# Altium PCB Avometer v1.1 Simple.PcbDoc
Units mm, origin at the board's own origin, x right, y up, seen from the top; angles counter-clockwise.
Board outline 45 x 30 mm, 2 copper layers (Top Layer, Bottom Layer), stack 1.571 mm thick; 45 components, 43 nets, 171 pads, 36 vias.
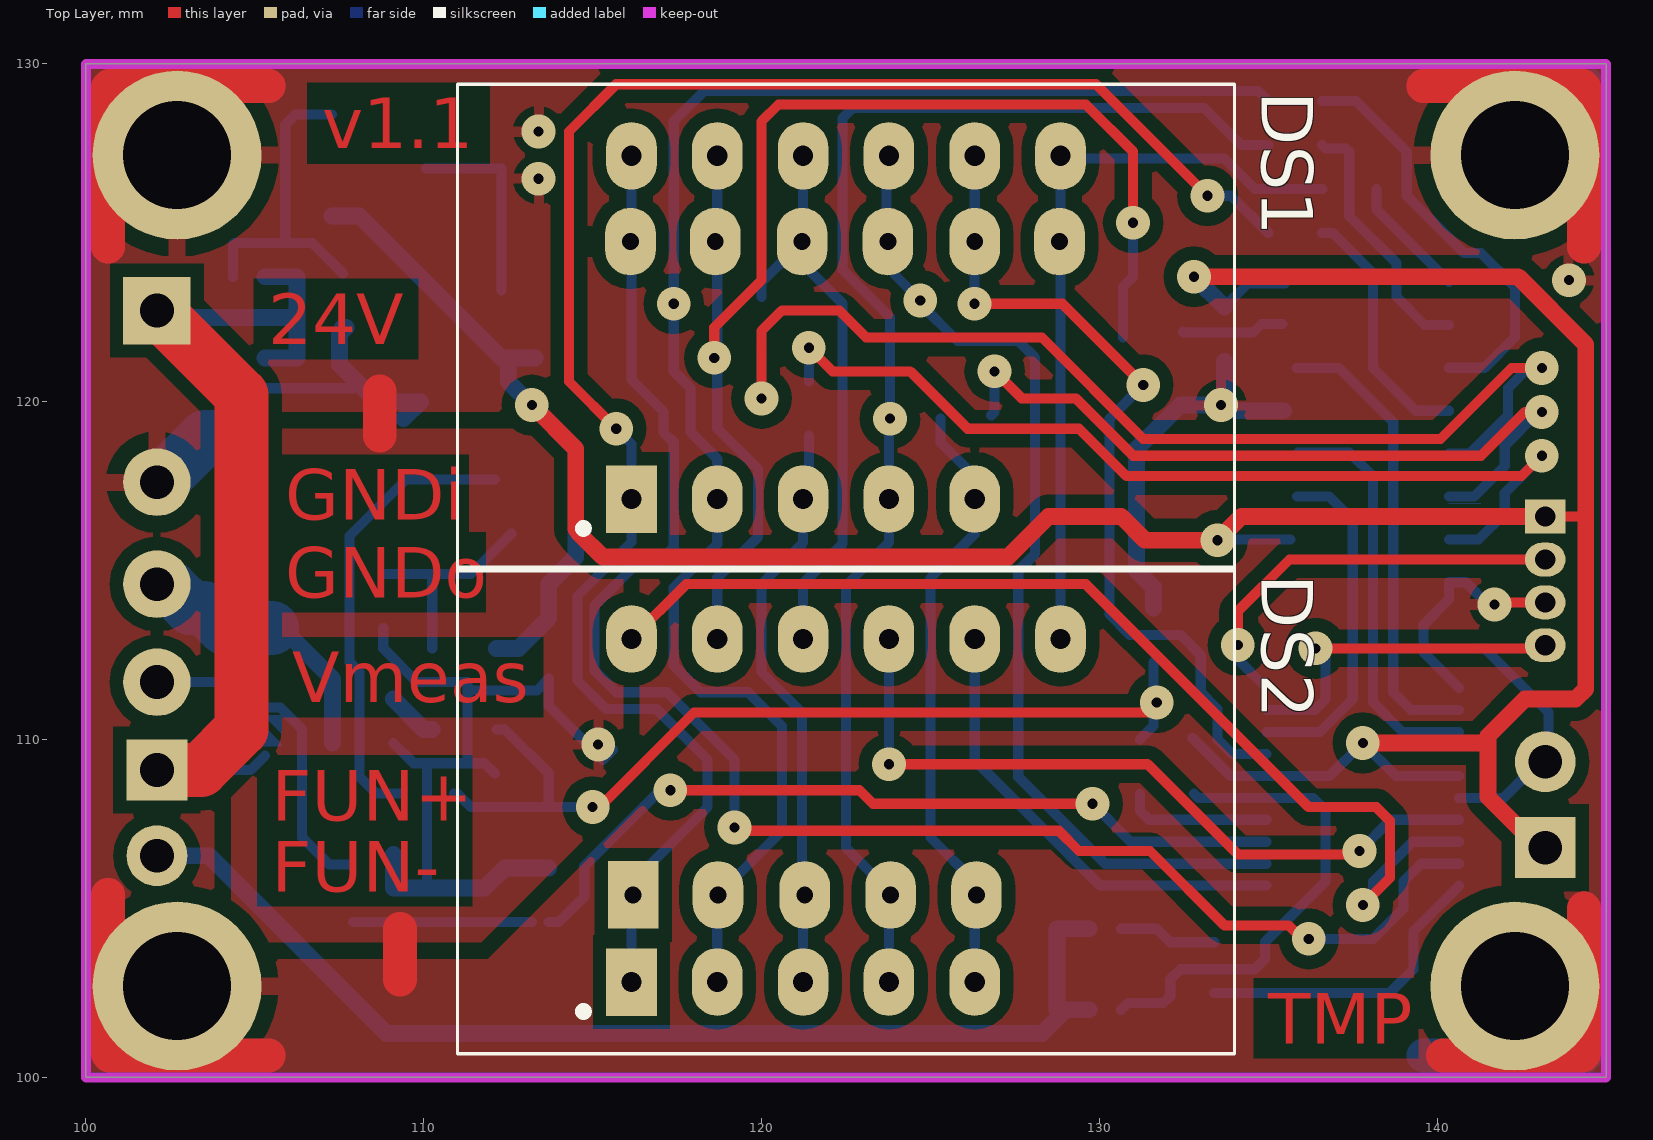
[diagram p0: Top Layer view]
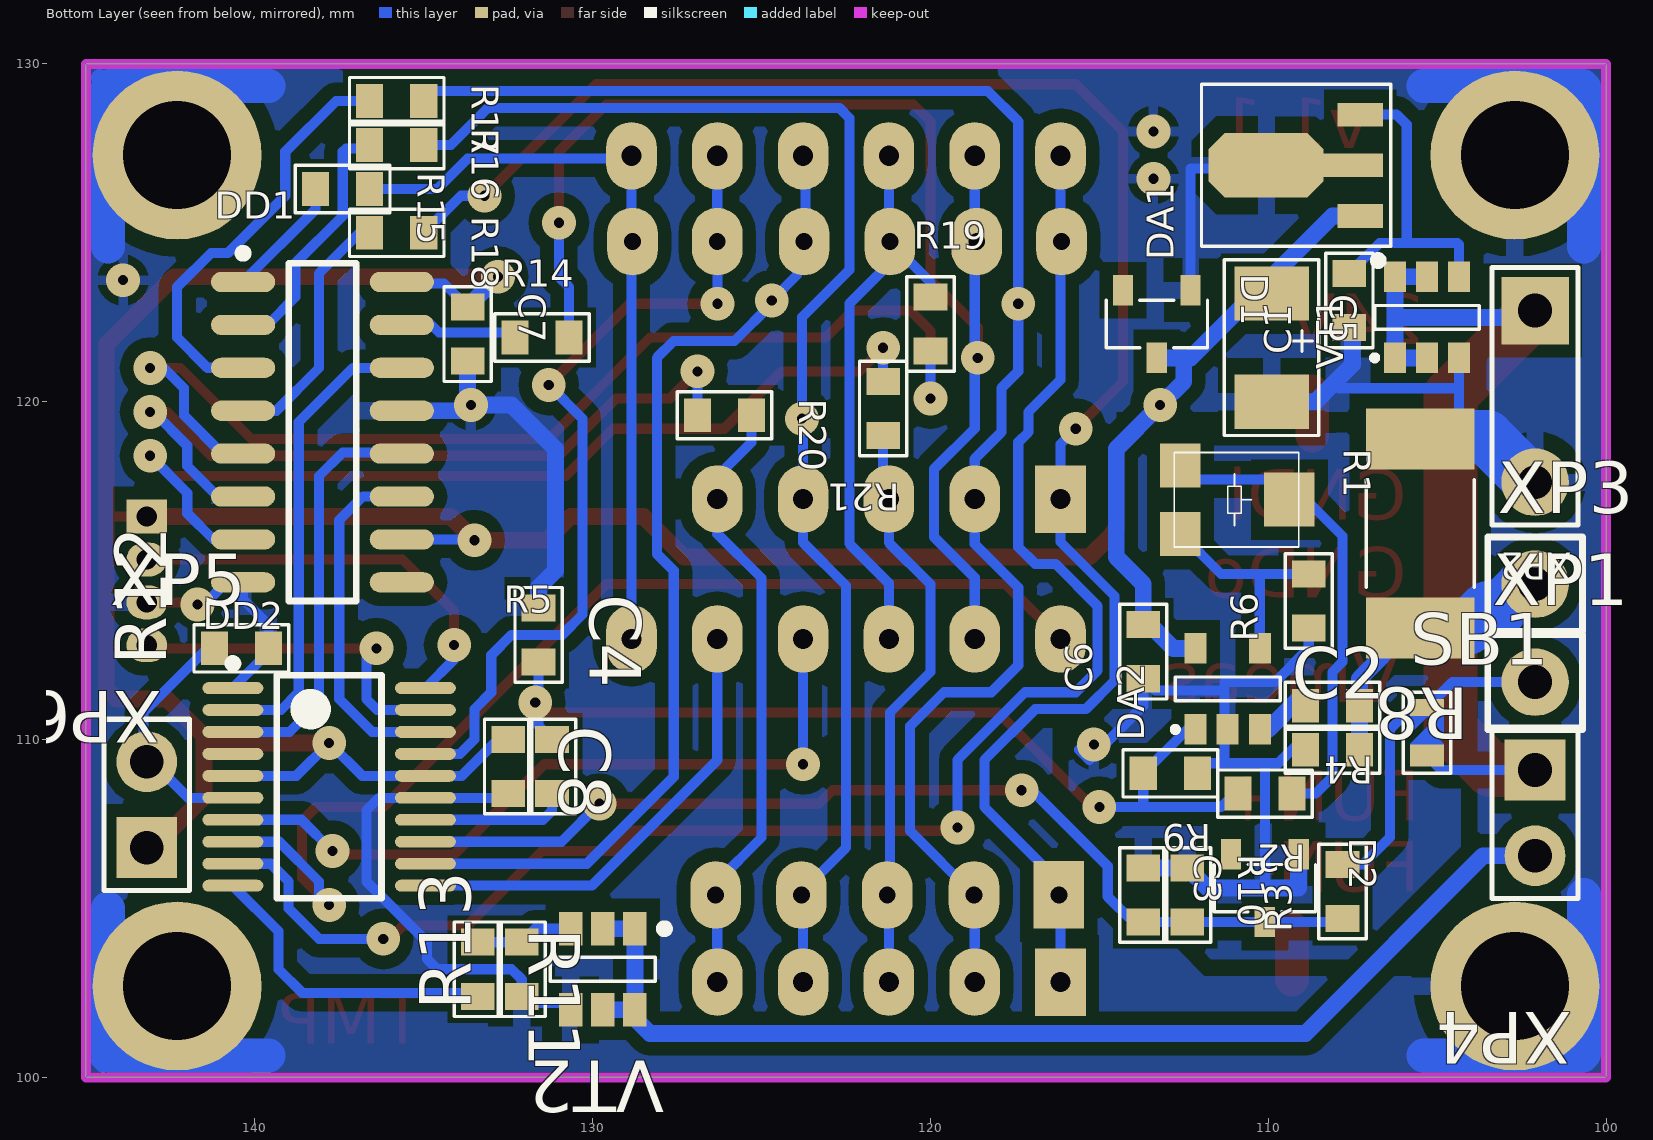
[diagram p1: Bottom Layer view, seen from below]
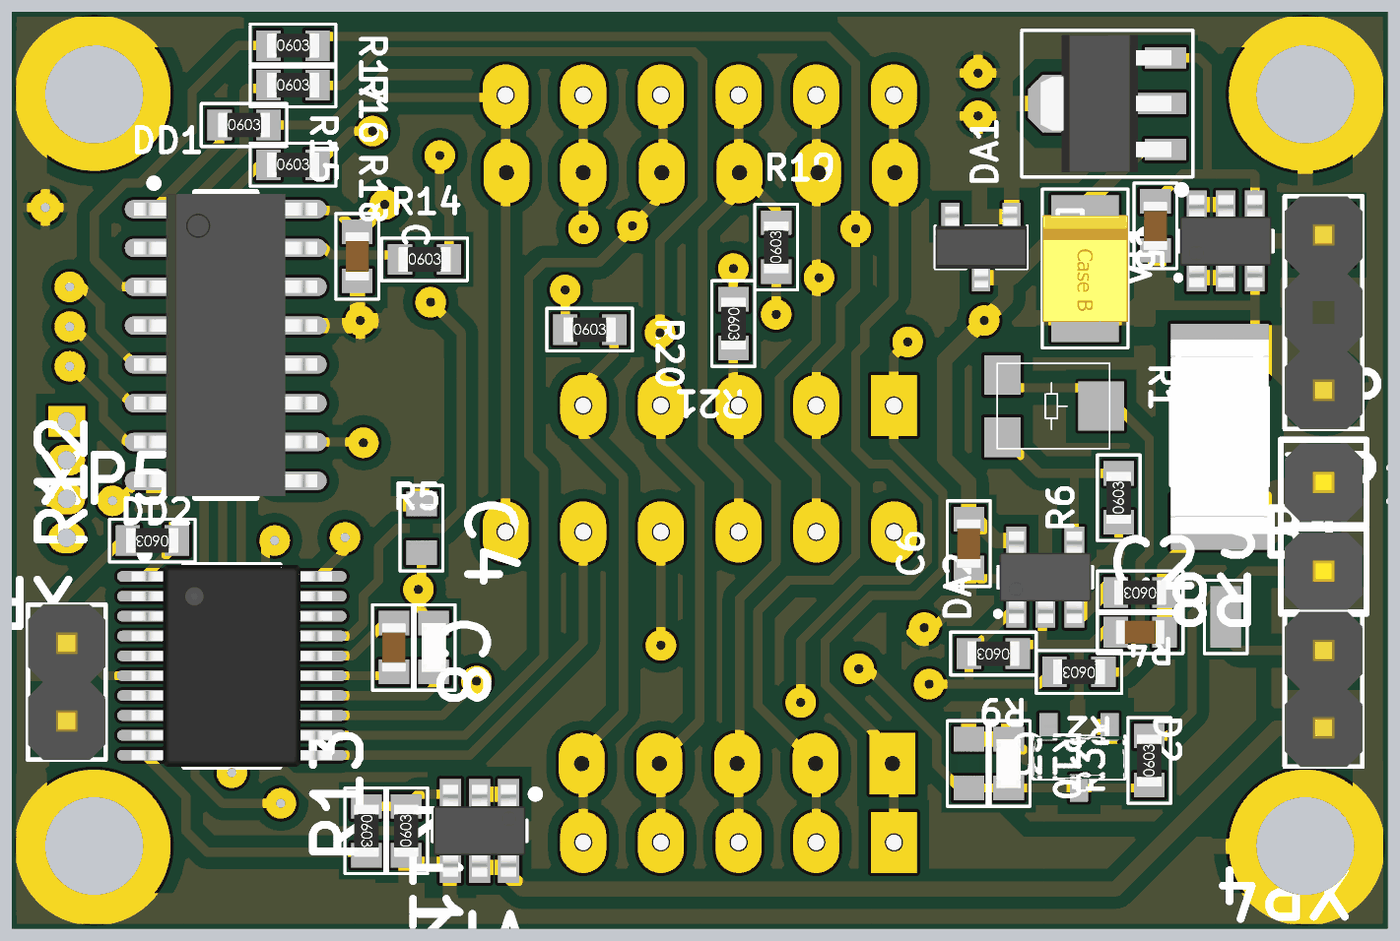
[diagram p2: 3D render of the assembled board from below, using the file's embedded part models]

## Layer stack, top to bottom
Top Solder: solder mask 0.0102, Solder Resist, Dk 3.5
Top Layer: signal copper 0.0356
Dielectric 1: dielectric 1.5, FR-4, Dk 4.8
Bottom Layer: signal copper 0.0356
Bottom Solder: solder mask 0.0102, Solder Resist, Dk 3.5

## Board outline
100,100 145,100 145,130 100,130

## Design rules (kind name [scope] priority, off if disabled: settings)
AssemblyTestPointUsage [All] p1 off:
AssemblyTestpoint [All] p1 off: testpointundercomponent=TRUE minsize=1.016 maxsize=2.54 preferedsize=1.524 minholesize=0 maxholesize=1.016 preferedholesize=0.813 testpointgrid=0.025 usegrid=TRUE gridtolerance=0 allowsidetop=TRUE allowsidebottom=TRUE
Clearance KeepOutClrnc [All vs OnLayer('Keep-Out Layer')] p1: gap=0 ignorepadtopadclearanceinfootprint=FALSE
Clearance Cl-nce_USBUF [(ObjectKind = 'Pad') and (Component = 'DA10') vs ispad or isvia or istrack or isregion] p2: gap=0.15 ignorepadtopadclearanceinfootprint=FALSE except(0: Arc-Hole Track-Hole SMDPad-Hole THPad-Hole Via-Hole Fill-Hole Poly-Hole Region-Hole Text-Hole)
Clearance Cl-nce_Poly-Pads&Vias_1 [InPolygon vs ispad or isvia or istrack or isregion or isfill] p3: gap=0.4 ignorepadtopadclearanceinfootprint=FALSE except(0: Arc-Hole Track-Hole SMDPad-Hole THPad-Hole Via-Hole Fill-Hole Poly-Hole Region-Hole Text-Hole)
Clearance [All] p4: gap=0.2 ignorepadtopadclearanceinfootprint=FALSE except(0: Arc-Hole Track-Hole SMDPad-Hole THPad-Hole Via-Hole Fill-Hole Poly-Hole Region-Hole Text-Hole)
ComponentClearance [All] p1: gap=0 collisioncheckmode=3 verticalgap=0.1 showdistances=TRUE
DiffPairsRouting [All] p1: maxlimit=100 minlimit=0.25 mostfreqgap=0.254 toplayer_minwidth=0.2 toplayer_maxwidth=0.5 toplayer_prefwidth=0.25 bottomlayer_minwidth=0.2 bottomlayer_maxwidth=0.5 bottomlayer_prefwidth=0.25 maxuncoupledlength=50
FabricationTestPointUsage [All] p1 off: valid=0 allowmultiple=FALSE
FabricationTestpoint [All] p1 off: side=3 testpointundercomponent=TRUE minsize=1.016 maxsize=2.54 preferedsize=1.524 minholesize=0 maxholesize=1.016 preferedholesize=0.813 testpointgrid=0.025 allowsidetop=TRUE allowsidebottom=TRUE usegrid=TRUE gridtolerance=0
HoleSize [All] p1: absolutevalues=TRUE maxlimit=4 minlimit=0.025 maxpercent=80.000 minpercent=20.000
MatchedLengths [InNetClass('DiffPairs')] p1: tolerance=1 checknetsindiffpair=TRUE checkdiffpairvsdiffpair=FALSE checkxsignals=FALSE checkothers=FALSE
PlaneClearance [All] p1: clearance=0.1
PolygonConnect PCon_fill [All vs isregion or isfill] p1 off: connectstyle=Direct reliefconductorwidth=0.254 reliefentries=4 polygonreliefangle="90 Angle" airgapwidth=0.254
PolygonConnect PCon_via [All vs isvia] p2: connectstyle=Relief reliefconductorwidth=0.3 reliefentries=4 polygonreliefangle="90 Angle" airgapwidth=0.25
PolygonConnect [All] p3: connectstyle=Relief reliefconductorwidth=0.5 reliefentries=4 polygonreliefangle="90 Angle" airgapwidth=0.5
RoutingVias [All] p1: holewidth=0.3 width=1.27 viastyle="Through Hole" minholewidth=0.3 minwidth=1.27 maxholewidth=0.3 maxwidth=1.27
SilkToBoardRegionClearance [All] p1 off:
SilkToSilkClearance [All] p1 off: silktosilkclearance=0
SilkToSolderMaskClearance [IsPad] p1 off: minsilkscreentomaskgap=0.1 clearancetoexposedcopper=TRUE
SolderMaskExpansion [All] p1: expansion=0.102
Width [All] p1: maxlimit=2.5 minlimit=0.3 preferedwidth=0.3
19 further rules are at their usual default settings.

## Components (designator, comment, footprint, x,y, rotation, side; value= is the part's Value field where it differs from the comment)
C1 "0.1uF" "CAP 0603_N" 107.6,123 r90 bottom
C2 "0.1" "CAP 0603_N" 108.1,109.7 r180 bottom
C3 "0.1uF" "CAP 0603_N" 113.7,105.4 r270 bottom
C4 "0.1" "CAP 0603_N" 131.6,113.1 r270 bottom
C5 "100uF 6V3" CAP_TANT_B_TYPE_3528-21 109.9,121.6 r270 bottom
C6 "0.1" "CAP 0603_N" 113.7,112.6 r90 bottom
C7 "0.1" "CAP 0603_N" 133.7,122 r270 bottom
C8 "0.1" "CAP 0603_N" 132.5,109.2 r270 bottom
D1 "BZX84C3V6" SOT-23_L 113.3,122.3 r270 bottom
D2 "BZX84-3V6" SOT-23_L 110.1,105.6 r270 bottom
DA1 "L78L33ABUTR" SOT-89 107.5,127 r90 bottom
DA2 "MCP6001" SOT-23-5_L 111.2,111.5 r90 bottom
DD1 "74HC595D SMD" SOIC-16_L 138,119.1 r180 bottom
DD2 "STM32F030F4P6" TSSOP-20_N 137.8,108.6 r180 bottom
DS1 "7SEGM_KEM-3631-AG" 7SEGM_KEM-3631-AG_BLUE 122.5,122.2 r0 top locked
DS2 "7SEGM_KEM-3631-AG" 7SEGM_KEM-3631-AG_RED 122.5,107.9 r0 top locked
R1 "10k" "RES VAR 1" 111,117.1 r270 bottom
R2 "36k" "RES 0603_N" 110.1,108.4 r0 bottom
R3 "100k" "RES 0603_N" 107.8,105.5 r90 bottom
R4 "100" "RES 0603_N" 108.1,111 r0 bottom
R5 "10k" "RES 0603_N" 131.2,109.2 r90 bottom
R6 "300" "RES 0603_N" 108.8,114.1 r90 bottom
R8 "0.02" "RES 2512" 105.5,116.1 r270 bottom
R9 "10k" "RES 0603_N" 112.9,109 r0 bottom
R10 "15k" "RES 0603_N" 112.4,105.4 r270 bottom
R11 "47" "RES 0603_N" 133.4,103.2 r270 bottom
R12 "33k" "RES 0603_N" 140.4,112.7 r0 bottom
R13 "100k" "RES 0603_N" 132.1,103.2 r90 bottom
R14 "47" "RES 0603_N" 131.5,121.9 r180 bottom
R15 "47" "RES 0603_N" 137.4,126.3 r180 bottom
R16 "47" "RES 0603_N" 135.8,127.6 r180 bottom
R17 "47" "RES 0603_N" 135.8,128.9 r180 bottom
R18 "47" "RES 0603_N" 135.8,125 r180 bottom
R19 "47" "RES 0603_N" 120,122.3 r90 bottom
R20 "47" "RES 0603_N" 126.1,119.6 r180 bottom
R21 "47" "RES 0603_N" 121.4,119.8 r270 bottom
SB1 "Source" JUMPER_SOLDERED 105.3,110.2 r90 bottom
VT1 "IRLMS6802T" SOT-23-6_L 105.3,122.5 r90 bottom
VT2 "IRLTS6342" TSOP-6 129.7,103.2 r0 bottom
XP1 "USENSE" CON_PIN 102.1,111.7 r180 bottom
XP2 "Input" CON_5.08MM_1X2 102.1,122.7 r270 bottom
XP3 "Output" CON_PIN 102.1,114.6 r270 bottom
XP4 "Fun" CON_2.54MM_1X2 102.1,109.1 r270 bottom
XP5 "Temp" CON_2.54MM_1X2 143.2,106.8 r90 bottom
XP6 "SWD" CON_1.27MM_1X4_SWD 143.2,116.6 r270 bottom

## Footprints (in the part's own frame and the unit in brackets; to place one, negate y for a bottom-side part, rotate by r counter-clockwise, add the part's x,y. Pads: shape width x height; smd on the part's side, far side on the other; paste and mask are expansions set on the pad)
7SEGM_KEM-3631-AG_BLUE [mm] "LED, 7-Segment Display, 7.62 mm, RHD; 10 Leads; Row Space 5.08 mm; Pitch 2.54 mm"
  rect 1.5x2 hole 0.6: 1(-6.35,-5.08)
  oval 1.5x2 hole 0.6: 2(-3.81,-5.08) 3(-1.27,-5.08) 4(1.27,-5.08) 5(3.81,-5.08) 7(6.35,5.08) 8(3.81,5.08) 9(1.27,5.08) 10(-1.27,5.08) 11(-3.81,5.08) 12(-6.35,5.08)
  silkscreen extent -11.5,-7.2 11.5,7.2, body extent -11.3,-7.05 11.3,7.05, height 8.21
7SEGM_KEM-3631-AG_RED [mm] "LED, 7-Segment Display, 7.62 mm, RHD; 10 Leads; Row Space 5.08 mm; Pitch 2.54 mm"
  rect 1.5x2 hole 0.6: 1(-6.35,-5.08)
  oval 1.5x2 hole 0.6: 2(-3.81,-5.08) 3(-1.27,-5.08) 4(1.27,-5.08) 5(3.81,-5.08) 7(6.35,5.08) 8(3.81,5.08) 9(1.27,5.08) 10(-1.27,5.08) 11(-3.81,5.08) 12(-6.35,5.08)
  silkscreen extent -11.5,-7.2 11.5,7.2, body extent -11.3,-7.05 11.3,7.05, height 7.2
"CAP 0603_N" [mm] "Chip Capacitor; Body 1.6 x 0.8 mm (LxW typ)"
  rect 0.8x1 smd: 1(-0.8,0) 2(0.8,0)
  silkscreen extent -1.4,-0.7 1.4,0.7, body extent -0.8,-0.4 0.8,0.4, height 0.6
CAP_TANT_B_TYPE_3528-21 [mm] "Capacitor, SM Tantalum; Body 3.5 x 2.8 mm (LxW typ)"
  rect 1.6x2.2 smd: 1(-1.6,0) 2(1.6,0)
  silkscreen extent -2.6,-1.4 2.6,1.4, body extent -1.75,-1.4 1.75,1.4, height 1.9
CON_1.27MM_1X4_SWD [mm] "Connector; Header; 4 Position"
  rect 1x1.2 hole 0.6: 1(0,0)
  oval 1x1.2 hole 0.6: 2(1.27,0) 3(2.54,0) 4(3.81,0)
CON_2.54MM_1X2 [mm] "Connector; Header; 2 Position"
  rect 1.8x1.8 hole 1: 1(0,0)
  round 1.8 hole 1: 2(2.54,0)
  silkscreen extent -1.27,-1.27 3.8,1.27, body extent -1.28,-1.27 3.8,1.27, height 8.63
CON_5.08MM_1X2 [mm] "Connector; Header; 2 Position"
  rect 2x2 hole 1: 1(0,0)
  round 2 hole 1: 2(5.08,0)
  silkscreen extent -1.27,-1.27 6.35,1.27, body extent -1.27,-1.27 6.35,1.27, height 8.5
CON_PIN [mm] "Connector; Plug"
  round 2 hole 1: 1(0,0)
  silkscreen extent -1.4,-1.4 1.4,1.4, body extent -1.27,-1.27 1.27,1.27, height 8.85
JUMPER_SOLDERED [mm] "Chip Resistor, Body 2.0x1.2mm, IPC Low Density"
  rect 0.65x1 smd: 1(-0.675,0)
  rect 0.5x1 smd: 2(0.75,0)
  Top Layer region: -0.025,0.5 -0.025,0.5 0.475,0 -0.025,-0.5 0.525,-0.5 0.525,0.5
  Top Layer region: -0.4,-0.5 -0.4,0.5 -0.325,0.5 -0.325,0.5 0.175,0 -0.325,-0.5
  silkscreen extent -1.2,-0.7 1.2,0.7
"RES 0603_N" [mm] "Chip Resistor, Body 2.0x1.2mm, IPC Low Density"
  rect 0.8x1 smd: 1(-0.8,0) 2(0.8,0)
  silkscreen extent -1.4,-0.7 1.4,0.7, body extent -0.85,-0.4 0.85,0.4, height 0.56
"RES 2512" [mm] "Chip Resistor; Body 6.3 x 3.2 mm (LxW typ)"
  rect 1.8x3.2 smd: 1(-2.8,0) 2(2.8,0)
  silkscreen extent -1.6,-1.6 1.6,1.6, body extent -3.2,-1.6 3.2,1.6, height 0.6
"RES VAR 1" [mm] "Chip Resistor, Body 2.0x1.2mm, IPC Low Density"
  rect 1.3x1.2 smd: 1(-1.016,-1.6) 3(1.016,-1.6)
  rect 1.6x1.5 smd: 2(0,1.626)
  silkscreen extent -1.4,-1.78 1.4,1.91
SOIC-16_L [mm] "SOIC, 16-Leads, Body 9.9x3.9mm, Pitch 1.27mm, IPC High Density"
  oval 1.9x0.6 smd: 1(-2.35,4.445) 2(-2.35,3.175) 3(-2.35,1.905) 4(-2.35,0.635) 5(-2.35,-0.635) 6(-2.35,-1.905) 7(-2.35,-3.175) 8(-2.35,-4.445) 9(2.35,-4.445) 10(2.35,-3.175) 11(2.35,-1.905) 12(2.35,-0.635) 13(2.35,0.635) 14(2.35,1.905) 15(2.35,3.175) 16(2.35,4.445)
  silkscreen extent -2.48,-5 1,5.42, body extent -3,-4.95 3,4.95, height 1.4
SOT-23-5_L [mm] "SOT23, 5-Leads, Body 2.9x1.7mm, Pitch 0.95mm, Lead Span 2.8mm, IPC High Density"
  rect 0.9x0.65 smd: 1(-1.2,0.95) 2(-1.2,0) 3(-1.2,-0.95) 4(1.2,-0.95) 5(1.2,0.95)
  silkscreen extent -1.28,-1.55 0.35,1.63, body extent -1.5,-1.5 1.5,1.5, height 1.3
SOT-23-6_L [mm] "SOT23, 5-Leads, Body 2.9x1.7mm, Pitch 0.95mm, Lead Span 2.8mm, IPC High Density"
  rect 0.9x0.65 smd: 1(-1.2,0.95) 2(-1.2,0) 3(-1.2,-0.95) 4(1.2,-0.95) 5(1.2,0) 6(1.2,0.95)
  silkscreen extent -1.28,-1.55 0.35,1.63, body extent -1.5,-1.5 1.5,1.5, height 1.3
SOT-23_L [mm] "SOT23, 3-Leads, Body 2.9x1.3mm, Pitch 0.95mm, Lead Span 2.3mm - Reverse Pinning, IPC High Density"
  rect 0.9x0.6 smd: 1(-1,1) 2(-1,-1) 3(1,0)
  silkscreen extent -0.7,-1.5 0.7,1.5, body extent -1.32,-1.5 1.32,1.5, height 1.08
SOT-89 [mm] "SOT-89; Body 4.6 x 4.25 mm, inc. leads (LxW max)"
  rect 0.7x1.35 smd: 1(-1.5,-0.225) 3(1.5,-0.225)
  rect 0.7x1.8 smd: 2(0,0)
  oct 1.9x3.4 smd: 2(0,2.563)
  silkscreen extent -2.94,-1.12 2.4,4.48, body extent -2.25,-0.42 2.25,3.88, height 1.49
TSOP-6 [mm] "SOT-457/SC-74; 6 Leads; Body 3.1 x 2.9 mm, inc. leads (LxW max)"
  rect 0.7x1 smd: 1(-0.95,-1.2) 2(0,-1.2) 3(0.95,-1.2) 4(0.95,1.2) 5(0,1.2) 6(-0.95,1.2)
  silkscreen extent -1.95,-1.32 1.55,0.35, body extent -1.5,-1.5 1.5,1.5, height 1.3
TSSOP-20_N [mm] "SOP, 20-Leads, Body 6.6x4.5mm, Pitch 0.65mm, IPC Medium Density"
  oval 1.8x0.35 smd: 1(-2.85,2.925) 2(-2.85,2.275) 3(-2.85,1.625) 4(-2.85,0.975) 5(-2.85,0.325) 6(-2.85,-0.325) 7(-2.85,-0.975) 8(-2.85,-1.625) 9(-2.85,-2.275) 10(-2.85,-2.925) 11(2.85,-2.925) 12(2.85,-2.275) 13(2.85,-1.625) 14(2.85,-0.975) 15(2.85,-0.325) 16(2.85,0.325) 17(2.85,0.975) 18(2.85,1.625) 19(2.85,2.275) 20(2.85,2.925)
  silkscreen extent -2.98,-3.3 1.55,3.77, body extent -3.27,-3.3 3.28,3.3, height 1.2

## Part data
C1 C2 C4 C6 C7 C8: library part CAP_SMD, "Capacitor SMD"
C3: library part CAP_SMD
C5: library part CAP_SMD_TANT, "Capacitor SMD Tantalum"
D1 D2: library part BZX84, "Zener Diode", LatestRevisionDate=17-Jul-2002, LatestRevisionNote="Re-released for DXP Platform.", PackageDescription="Diode, Thru-Hole; 2 Leads; 0.7 in Pin Spacing", PackageReference=DIODE-0.7, Published=8-Jun-2000, Publisher="Altium Limited"
DA1: "Vin=30V Positive Voltage Regulator", ComponentLink1Description="Manufacturer Link", ComponentLink1URL=http://www.st.com/, DatasheetVersion=Feb-1999, LatestRevisionDate=17-Jul-2002, LatestRevisionNote="Re-released for DXP Platform.", PackageDescription="TO, Flat Index; 3 In-Line, Axial Leads; Body Dia. 4.8mm; Leads 0.51 x 0.51 mm (max)", PackageReference=TO92, Published=24-Aug-2001, Publisher="Altium Limited"
DA2: "1 MHz, Low-Power Op Amp"
DD1: "8-Bit Shift Register with 3-State Output Registers", Code_IPC=SOIC127P600-16, ComponentLink1Description="Manufacturer Link", ComponentLink1URL=http://www.ti.com/, ComponentLink2Description=Datasheet, ComponentLink2URL=http://www-s.ti.com/sc/ds/sn74hc595.pdf, DatasheetVersion=May-1997, LatestRevisionDate=13-Apr-2006, LatestRevisionNote="IPC-7351 Footprint Added.", PackageDescription="16-Pin Small Outline Integrated Circuit 1.27 mm Pitch", PackageReference=D016, PackageVersion=Jan-1998, Published=8-Jun-2000, Publisher="Altium Limited"
DD2: "Cortex-M0 32-bit MCU, 16 KB Flash, 4 KB Internal RAM, 15 I/Os, 20-pin TSSOP, -40 to 85 degC"
DS1 DS2: "7.62 mm Black Surface Green 7-Segment Display: CC, RH DP", Colour=Green, ComponentLink1Description="Manufacturer Link", ComponentLink1URL=http://www.agilent.com/, DatasheetVersion=19-Feb-2002, LatestRevisionDate=17-Dec-2003, LatestRevisionNote="Schematic revised, PCB Footprint replaced.", MinimumIntensity="860 ucd", Note="IF = 10 mA", PackageDescription="LED, 7-Segment Display, 7.62 mm, RHD; 10 Leads; Row Space 5.08 mm; Pitch 2.54 mm", PackageReference=A, PackageVersion=11-Feb-2002, Published=8-Jun-2000, Publisher="Altium Limited"
R1: library part RES_SMD_Tap, "Tapped Resistor", LatestRevisionDate=17-Jul-2002, LatestRevisionNote="Re-released for DXP Platform.", PackageDescription="Variable Resistor, Thru-Hole; 3 Leads", PackageReference=VR3, Published=24-Mar-1999, Publisher="Altium Limited", Set Position=0.5, Sim Note="Enter the Resistance value and the set point into parameter fields."
R2 R4 R6 R9 R14 R15 R16 R17 R18 R19 R20 R21: library part Resistor_SMD
R3 R10: library part RES_SMD
R5 R8: library part RES_SMD, "Resistor"
R11 R12 R13: library part RES_SMD, "Chip Resistor"
SB1: library part Jumper_SMD, "Jumper"
VT1: "P-Channel MOSFET 20V 4.5A", Code_IPC=SOIC127P600-8, Code_JEDEC=MS-012-AA, ComponentLink1Description="Manufacturer Link", ComponentLink1URL=http://www.irf.com/, ComponentLink2Description=Datasheet, ComponentLink2URL=http://www.irf.com/product-info/datasheets/data/irf7416.pdf, DatasheetVersion=Aug-1997, LatestRevisionDate=13-Apr-2006, LatestRevisionNote="IPC-7351 Footprint Added.", PackageDescription="8-Pin Plastic Small Outline Integrated Circuit 1.27 mm Pitch", PackageReference=SO-8, PackageVersion=Feb-2001, Published=8-Jun-2000, Publisher="Altium Limited"
VT2: "30V, 6.7A, 1V N-Channel MOSFET", ComponentLink1Description="Manufacturer Link", ComponentLink1URL=http://www.irf.com/, ComponentLink2Description=Datasheet, ComponentLink2URL=http://www.irf.com/product-info/datasheets/data/irlz34n.pdf, DatasheetVersion=Aug-1997, LatestRevisionDate=17-Jul-2002, LatestRevisionNote="Re-released for DXP Platform.", Note="Pin 2 is electrically connected to pin 4.", PackageDescription="TO, Thru-Hole, Vertical, Heatsink Mounted; 3 In-Line Leads; Pitch 2.54 mm", PackageReference=TO-220AB, PackageVersion=Feb-1997, Published=8-Jun-2000, Publisher="Altium Limited"
XP1 XP3: library part CON_1x1_PIN, "Plug papa", LatestRevisionDate=17-Jul-2002, LatestRevisionNote="Re-released for DXP Platform.", Publisher="Altium Limited"
XP2: library part CON_5.08mm_1x2, "Header, 2-Pin", LatestRevisionDate=17-Jul-2002, LatestRevisionNote="Re-released for DXP Platform.", Publisher="Altium Limited"
XP4 XP5: library part CON_2.54mm_1x2, "Header, 2-Pin", LatestRevisionDate=17-Jul-2002, LatestRevisionNote="Re-released for DXP Platform.", Publisher="Altium Limited"
XP6: library part CON_1.27mm_1x4_SWD, "Header, 3-Pin", LatestRevisionDate=17-Jul-2002, LatestRevisionNote="Re-released for DXP Platform.", Publisher="Altium Limited"

## Free pads (board coordinates)
  round 5 hole 3.2: 0(102.7,127.3) 0(102.7,102.7) 0(142.3,127.3) 0(142.3,102.7)
  rect 1.5x2 hole 0.5: 1(116.2,105.4)
  oval 1.5x2 hole 0.5: 2(118.71,105.4) 3(121.28,105.4) 4(123.82,105.4) 5(126.36,105.4) 7(128.82,124.74) 8(126.31,124.74) 9(123.74,124.74) 10(121.2,124.74) 11(118.63,124.74) 12(116.12,124.74)

## Via types
v1: diameter 1, hole 0.3, Top Layer to Bottom Layer, 36 vias

## Nets (pads, with @x,y where several pads share a name; then routed paths per layer and width w, separated by ;. In a path a pad name is that pad's centre, name@x,y a point inside that pad or via, vN(x,y) a via of type N, cw(c..) or ccw(c..) an arc to the next point about the centre after c; other vN are vias at no path point)
24V: SB1.1 VT1.1 VT1.2 VT1.5 VT1.6 XP2.1 XP4.1 | length 28.4
  Top Layer w1.6: XP4.1 103.4,109.1 104.6,110.3 104.6,120.2 XP2.1
  Bottom Layer w0.3: XP4.1 104.875,109.1 SB1.1 ; VT1.1 VT1.1@106.3,121.25
  Bottom Layer w0.5: XP2.1 102.3,122.5 106.25,122.5 ; VT1.2 VT1.1 106.25,122.5 ; VT1.5 VT1.6 106.25,122.5
FUN: DD2.10 R11.2 | length 9.2
  Bottom Layer w0.3: R11.2@133.4,102.5 138.6,102.5 139.3,103.2 139.3,104.325 DD2.10
GND: C1.1 C2.1 C3.1 C4.1 C5.2 C6.1 C7.2 C8.2 D1.1 D2.1 DA1.2 DA2.2 DD1.8 DD1.13 DD2.1 DD2.15 pad.0 R6.1 R8.1 R9.1 R10.1 R12.1 R13.1 VT1.3 VT2.4 XP2.2 XP6.3 | length 154.5
  Top Layer w0.3: v1(141.7,114) 141.76,114.06 XP6.3
  Top Layer w1: 100.65,100.7 100.65,105.4 ; 100.65,124.6 100.65,129.3 ; 100.7,100.65 105.4,100.65 ; 100.7,129.35 105.4,129.35 ; 108.7,119 108.7,120.3 ; 109.3,102.9 109.3,104.4 ; 139.6,129.35 144.3,129.35 ; 140.172,100.65 144.3,100.65 ; 144.35,100.7 144.35,105 ; 144.35,124.6 144.35,129.3
  Bottom Layer w0.3: VT1.3 104.35,120.35 ; R8.1@104.5,118.95 104.35,119.1 104.35,120.35 ; 108.05,120.55 107.9,120.4 104.4,120.4 104.35,120.35 ; R6.1 108.8,112.7 109.8,111.7 111.3,111.7 111.3,111.45 ; C2.1@109.1,109.9 109.7,109.3 110.1,109.3 ; DA1.2@110.062,126.9 112.3,126.9 D1.1 ; 110.1,105.6 110.1,109.3 ; R9.1 111.8,109.3 111.3,109.3 ; v1(115.163,109.85) 115.45,109.85 115.6,109.7 115.3,109.4 113.7,111 C6.1 113.35,111.45 111.3,111.45 ; VT2.4 130.85,102.2 131.9,102.2 R13.1 132.1,102.9 132.4,103.2 134.6,103.2 134.9,103.5 134.9,104.002 136.7,105.802 136.7,107.9 136.325,108.275 DD2.15 132.925,108.275 C8.2@132.8,108.4 ; DD2.1 139.6,112.575 R12.1 139.6,113.4 140.35,114.15 DD1.8 140.845,114.655 141.5,114 v1(141.7,114) ; 110.1,109.3 111.3,109.3 ; 111.3,109.3 111.3,111.45
  Bottom Layer w0.5: C1.1 107.7,122.2 107.5,122 107.5,121.1 108.05,120.55 108.6,120 C5.2 C5.2@109.4,119.5 ; D2.1 109.1,105.6 110.1,105.6 111.8,105.6 R10.1 C3.1 ; C4.1 131.6,114.5 131.1,115 131.1,118.6 132.4,119.9 v1(133.6,119.9) ; C7.2 133.7,120 v1(133.6,119.9) ; DD1.13@135.45,119.735 133.765,119.735 v1(133.6,119.9) ; 144.5,100.4 144.6,100.5
  Bottom Layer w1: 100.65,100.7 100.65,105.4 ; 100.65,124.6 100.65,129.3 ; 100.7,100.65 105.4,100.65 ; 100.7,129.35 105.4,129.35 ; 139.6,100.65 144.3,100.65 ; 139.6,129.35 144.3,129.35 ; 144.35,100.7 144.35,105 ; 144.35,124.6 144.35,129.3
  Bottom Layer w1.6: XP2.2@102.2,117.62 103.53,118.95 R8.1@104.5,118.95
  other v1: 143.9,123.6 113.4,126.6 113.4,128
K1: DD2.9 DS1.12 pad.12 | length 48.7
  Top Layer w0.3: v1@119,107.3 128.8,107.3 129.4,106.7 131.5,106.7 133.7,104.5 135.6,104.5 136,104.1 v1(136.2,104.1)
  Bottom Layer w0.3: DS1.12 116.15,120.65 117.1,119.7 117.1,119.1 117.4,118.8 117.4,115.7 116.9,115.2 116.3,115.2 115.05,113.95 115.05,112.05 115.7,111.4 117.2,111.4 119.2,109.4 v1(119.2,107.4) ; v1(136.2,104.1) 138.1,104.1 139,105 139,105.8 139.525,106.325 DD2.9
K2: DD2.12 DS1.9 pad.9 | length 29.9
  Bottom Layer w0.3: DS1.9 123.7,127.21 123.7,124.74 123.95,124.49 123.95,123.75 v1(124.7,123) 124.7,122.9 125.8,121.8 127.6,121.8 128.1,121.3 128.1,115.5 127.6,115 127.6,108.9 130.175,106.325 DD2.12
K3: DD2.17 DS1.8 pad.8 | length 25.1
  Top Layer w0.3: v1(126.3,122.9) 128.9,122.9 v1(131.3,120.5)
  Bottom Layer w0.3: v1(126.3,122.9) 126.3,124.73 pad.8 DS1.8 ; v1(131.3,120.5) 130.3,119.5 130.3,113.7 130.9,113.1 132.4,113.1 133,112.5 133,111.4 133.5,110.9 133.5,110.007 133.932,109.575 DD2.17
K4: DD2.8 DS2.12 | length 32.7
  Top Layer w0.3: DS2.12 117.77,114.6 129.6,114.6 136.2,108 138.2,108 138.6,107.6 138.6,105.9 v1(137.8,105.1)
  Bottom Layer w0.3: v1(137.8,105.1) 138.1,105.4 138.1,105.8 139.275,106.975 DD2.8
K5: DD2.7 DS2.9 | length 21.9
  Top Layer w0.3: v1(123.77,109.27) 131.43,109.27 134.1,106.6 v1@137.5,106.6
  Bottom Layer w0.3: v1(123.77,109.27) DS2.9 ; v1(137.7,106.7) 138.625,107.625 DD2.7
K6: DD2.11 DS2.8 | length 13.8
  Bottom Layer w0.3: DS2.8 126.31,109.39 130.025,105.675 DD2.11
LATCH: DD1.12 DD2.3 | length 12.1
  Bottom Layer w0.3: DD1.12@135.885,118.5 137.4,118.5 138.1,117.8 138.1,111.1 138.975,110.225 DD2.3
MEAS_I: DD2.14 R5.1 | length 4.4
  Bottom Layer w0.3: R5.1 131.2,107.9 131.475,107.625 DD2.14
MOSI: DD1.14 DD2.2 | length 13.7
  Bottom Layer w0.3: DD1.14@135.845,121 137.1,121 138.7,119.4 138.7,111.4 139.225,110.875 DD2.2
NetC1_2: C1.2 DA1.3 VT1.4 | length 9.6
  Bottom Layer w0.3: VT1.4 104.35,124.65 104.4,124.7 105.9,124.7 ; DA1.3 106.2,128.5 105.9,128.2 105.9,124.7 ; C1.2 106.7,124.7 105.9,124.7
NetC2_2: C2.2 R4.1 R8.2 XP3.1 | length 7.8
  Bottom Layer w0.5: R8.2@105.95,113.15 107.3,111.8 R4.1 C2.2@107.3,109.9
  Bottom Layer w1.6: XP3.1@102,114.5 102.5,114.5 103.1,113.9 103.5,113.9 104.1,113.3 R8.2
NetC4_2: C4.2 DA2.1 R2.2 R5.2 R9.2 | length 27.5
  Top Layer w0.3: v1(115,108) 115.2,108 118,110.8 v1@131.5,110.8
  Bottom Layer w0.3: R2.2 111,108.4 111.4,108 113.7,108 ; DA2.1 112.4,110.3 R9.2 113.7,108 ; v1(115,108) 113.7,108 ; R5.2 131.6,110.4 C4.2
  other v1: 131.7,111.1
NetDA2_3: DA2.3 R4.2 | length 1.5
  Bottom Layer w0.5: R4.2@109.1,111.2 110,110.3 DA2.3
NetDA2_4: DA2.4 R1.3 R6.2 | length 6.4
  Bottom Layer w0.3: R6.2 111.4,114.9 R1.3@112.592,116.092 ; DA2.4 110.25,114.85
NetDD1_1: DD1.1 R15.1 | length 3.6
  Bottom Layer w0.3: R15.1 138.2,125.7 DD1.1@140.35,123.55
NetDD1_2: DD1.2 R16.1 | length 7.7
  Bottom Layer w0.3: R16.1 136.7,127.5 137.3,127.5 137.4,127.4 137.4,125.5 138.8,124.1 138.8,123.1 139.625,122.275 DD1.2
NetDD1_3: DD1.3 R17.1 | length 12.6
  Bottom Layer w0.3: R17.1 137.6,128.9 139.1,127.4 139.1,126.1 140.8,124.4 141.3,124.4 142.3,123.4 142.3,121.9 141.405,121.005 DD1.3
NetDD1_4: DD1.4 R18.1 | length 7.6
  Bottom Layer w0.3: R18.1 136.9,125 138.1,123.8 138.1,121 139.365,119.735 DD1.4
NetDD1_5: DD1.5 R19.1 | length 33.5
  Top Layer w0.3: v1(120,120.1) 120,122.1 120.6,122.7 122.3,122.7 123.1,121.9 128.3,121.9 131.3,118.9 140.1,118.9 142.2,121 v1(143.1,121)
  Bottom Layer w0.3: v1(120,120.1) R19.1 ; DD1.5 140.965,118.465 142.1,119.6 142.1,120.4 142.7,121 v1(143.1,121)
NetDD1_6: DD1.6 R20.1 | length 24.2
  Top Layer w0.3: v1(126.9,120.9) 127.7,120.1 129.3,120.1 131,118.4 141.3,118.4 142.6,119.7 v1(143.1,119.7)
  Bottom Layer w0: DD1.6@140.35,116.995 141.295,116.995
  Bottom Layer w0.3: R20.1@126.8,119.6 126.9,119.7 v1(126.9,120.9) ; DD1.6 141.095,117.195 142,118.1 142,118.7 143,119.7 v1(143.1,119.7)
NetDD1_7: DD1.7 R21.1 | length 28.6
  Top Layer w0.3: v1(121.4,121.6) 122.1,120.9 124.4,120.9 126.1,119.2 129.4,119.2 130.8,117.8 142.5,117.8 v1(143.1,118.4)
  Bottom Layer w0.3: R21.1 v1(121.4,121.6) ; DD1.7 141.225,115.925 142,116.7 142,117.3 v1(143.1,118.4)
NetDD1_15: DD1.15 R14.1 | length 3.1
  Bottom Layer w0.3: R14.1@132.475,122.075 132.5,122.05 134.55,122.05 134.8,122.3 DD1.15@135.425,122.3
NetDS1_1: DS1.1 DS2.1 pad.1 R18.2 | length 52.3
  Top Layer w0.3: v1(115.7,119.2) 114.3,120.6 114.3,128 115.7,129.4 129.9,129.4 v1(133.2,126.1)
  Bottom Layer w0.3: v1(115.7,119.2) 116.15,118.75 DS1.1 116.15,115.85 114.55,114.25 114.55,111.75 115.4,110.9 116.9,110.9 118.4,109.4 118.4,108 116.2,105.8 pad.1 ; DS2.1 pad.1@116.15,104.653 ; v1(133.2,126.1) 133.9,126.1 R18.2
NetDS1_2: DS1.2 DS2.2 pad.2 R17.2 | length 47.6
  Bottom Layer w0.3: DS2.2 118.69,105.38 pad.2 120.6,107.29 120.6,110.4 119.6,111.4 118.2,111.4 117.4,112.2 117.4,114.5 118.69,115.79 DS1.2 118.69,118.31 117.9,119.1 117.9,120.4 117.4,120.9 v1(117.4,122.9) 117.4,128.3 118.3,129.2 134.7,129.2 R17.2
NetDS1_3: DS1.3 DS2.3 pad.3 R21.2 | length 17.3
  Bottom Layer w0.3: DS2.3 121.23,105.57 121.2,105.6 121.2,110.8 120,112 120,114.6 121.23,115.83 DS1.3 121.4,117.29 R21.2
NetDS1_4: DS1.4 DS2.4 pad.4 R16.2 | length 40.4
  Bottom Layer w0.3: DS2.4 123.77,105.53 122.5,106.8 122.5,114.56 123.77,115.83 DS1.4 v1@123.77,119.47 ; v1(123.8,119.5) 123.8,122.5 122.4,123.9 122.4,128.4 122.7,128.7 133.1,128.7 134.2,127.6 R16.2
NetDS1_5: DS1.5 DS2.5 pad.5 R20.2 | length 18.2
  Bottom Layer w0.3: R20.2@125.3,119.5 125.3,118.8 126.31,117.79 DS1.5 126.31,116.09 125,114.78 125,107.1 126.31,105.79 DS2.5
NetDS1_7: DS1.7 DS2.7 pad.7 R15.2 | length 22.4
  Bottom Layer w0.3: DS2.7@128.85,113.03 DS1.7 128.93,127.2 133.7,127.2 134.6,126.3 R15.2
NetDS1_10: DS1.10 DS2.10 pad.10 R19.2 | length 17.4
  Bottom Layer w0.3: R19.2 120,123.54 pad.10 ; DS2.10 121.23,114.63 122.4,115.8 122.4,122.9 121.23,124.07 DS1.10
NetDS1_11: DS1.11 DS2.11 pad.11 R14.2 | length 40.4
  Top Layer w0.3: v1(118.6,121.3) 118.6,122.2 120,123.6 120,128.3 120.5,128.8 129.6,128.8 131,127.4 v1(131,125.3) ; pad.11 pad.11@118.69,124.8
  Bottom Layer w0.3: v1(118.6,121.3) 118.69,121.39 DS1.11 ; DS2.11 118.69,114.79 119.9,116 119.9,118 118.69,119.21 v1@118.69,121.3 ; R14.2 130.7,123.4 131,123.7 v1(131,125.3)
NetR1_1: R1.1 R1.2 R2.1 | length 13.7
  Bottom Layer w0.3: R2.1 108.6,108.4 108.45,108.55 108.45,108.552 108.1,108.902 108.1,112 107.8,112.3 107.8,116.026 109.474,117.7 R1.1@112.1,117.7
NetR3_2: R3.2 SB1.2 XP1.1 | length 9.8
  Bottom Layer w0.3: XP1.1 104.55,111.7 SB1.2 105.75,110.95 106.4,110.3 106.4,107.1 107.2,106.3 R3.2
NetR11_1: R11.1 R13.2 VT2.3 | length 2.9
  Bottom Layer w0.3: VT2.3 131.7,104.4 R13.2 R11.1
OUT_FUN: VT2.1 VT2.2 VT2.5 VT2.6 XP4.2 | length 33.7
  Bottom Layer w0.3: VT2.6 VT2.6@129,102
  Bottom Layer w0.5: XP4.2 103.64,106.56 108.9,101.3 126.8,101.3 127.1,101.3 128.3,101.3 128.875,101.875 129,102 VT2.5 ; VT2.6 VT2.1 VT2.2
SCLK: DD1.11 DD2.18 | length 10.2
  Bottom Layer w0.3: DD2.18 136.525,110.225 137.5,111.2 137.5,116.5 136.8,117.2 DD1.11@135.855,117.2
SWCLK: DD2.20 XP6.2 | length 12.4
  Top Layer w0.3: v1(134.1,112.8) 134.1,113.8 135.63,115.33 XP6.2
  Bottom Layer w0.3: v1(134.1,112.8) 134.1,112.375 DD2.20
SWDIO: DD2.19 XP6.4 | length 10.3
  Top Layer w0.3: v1(136.4,112.7) 143.11,112.7 XP6.4
  Bottom Layer w0.3: DD2.19 136.375,110.875 136.7,111.2 136.7,112.4 v1(136.4,112.7)
TEMP: DD2.6 R12.2 XP5.2 | length 7.5
  Bottom Layer w0.3: DD2.6 141.975,108.275 XP5.2@143.3,109.6 ; R12.2 141.4,112.7 143.3,110.8 XP5.2@143.3,109.6 ; XP5.2@143.3,109.34 XP5.2@143.3,109.6
VBAT: C3.2 D2.3 DD2.13 R3.1 R10.2 | length 29.6
  Top Layer w0.3: v1@117,108.5 v1(117.3,108.5) 122.9,108.5 123.3,108.1 v1(129.8,108.1)
  Bottom Layer w0.3: R3.1@107.9,104.6 R10.2 C3.2@113.2,104.6 ; C3.2 114,104.6 114.75,105.35 114.75,106.25 117,108.5 v1(117.3,108.5) ; v1(129.8,108.1) 130.925,106.975 DD2.13
VMCU: C5.1 C6.2 C7.1 C8.1 D1.3 DA1.1 DA2.5 DD1.10 DD1.16 DD2.5 DD2.16 XP5.1 XP6.1 | length 103
  Top Layer w0.3: XP6.1 144.4,116.6
  Top Layer w0.5: v1(113.2,119.9) 114.5,118.6 114.5,116.233 114.597,116.136 114.597,116.103 115.3,115.4 127.3,115.4 128.5,116.6 130.65,116.6 131.35,115.9 v1(133.5,115.9) 134.2,116.6 XP6.1 ; v1(132.8,123.7) 142.4,123.7 144.4,121.7 144.4,116.6 144.4,111.5 144.1,111.2 142.6,111.2 141.5,110.1 141.5,109.9 ; v1(137.8,109.9) 141.5,109.9 ; XP5.1@143.5,106.8 XP5.1 143,106.8 141.5,108.3 141.5,109.7 141.5,109.9
  Bottom Layer w0.3: C8.1@132.75,110.05 133.875,108.925 DD2.16 136.825,108.925 v1(137.8,109.9) 138.775,108.925 DD2.5 ; v1(133.5,115.9) 133.525,115.925 DD1.10 ; C7.1 134.4,123.5 DD1.16@135.495,123.5
  Bottom Layer w0.5: DA1.1 108.1,125.5 112.3,121.3 112.5,121.3 ; DA2.5 112.8,112.7 113.7,113.6 113.7,114.6 114.5,115.4 114.5,118.6 v1(113.2,119.9) 112.5,120.6 112.5,121.3 ; D1.3 112.5,121.3 ; v1(132.8,123.7) C7.1
pads on no net: D1.2 D2.2 DD1.9 DD2.4

## Polygon pours and split planes (outlines as drawn)
GND on Top Layer "NONET_L01_P018" (solid, pour order 18): 100,130 100,100 145,100 145,130
GND on Top Layer "GND_L01_P014" (solid, pour order 14): 104.287,104.731 104.987,104.031 111.687,104.031 115.887,108.231 115.887,118.331 114.987,119.231 105.187,119.231 104.287,118.331
GND on Bottom Layer "Top Layer-No Net 1" (solid, pour order 16): 100,130 100,100 145,100 145,130
GND on Bottom Layer "GND_L02_P012" (solid, pour order 12): 104.3,104.2 105,103.5 111.7,103.5 115.9,107.7 115.9,117.8 115,118.7 105.2,118.7 104.3,117.8

## Keep-outs
Keep-Out Layer:
  the board outline again, w0.3

## Other copper
Top Layer:
  pour cut-out: 115,119.2 115.9,118.3 115.9,108.2 111.7,104 105,104 104.3,104.7 104.3,118.3 105.2,119.2 105.4,119.2 105.9,119.7 115.2,119.7 116.4,118.5 116.4,108 111.9,103.5 104.8,103.5 103.8,104.5 103.8,118.5 105,119.7 105.8,119.7
  pour cut-out: 104.3,119.7 114.5,119.7 114.5,119.4 114.3,119.2 104.5,119.2
  text "v1.1" at 107,127.5 h1.5
  text "24V" at 105.4,121.7 h1.5
  text "GNDi" at 105.9,116.5 h1.5
  text "GNDo" at 105.9,114.2 h1.5
  text "Vmeas" at 106.1,111.1 h1.5
  text "FUN+" at 105.5,107.6 h1.5
  text "FUN-" at 105.5,105.5 h1.5
  text "TMP" at 135,101 h1.5
Bottom Layer:
  pour cut-out: 103.9,119.8 107.6,119.8 107.6,111.9 103.4,111.9 103.4,120.3 107.6,120.3 107.6,119.7
  pour cut-out: 107.1,119.8
  pour cut-out: 104.3,119.7 114.5,119.7 114.5,119.4 114.3,119.2 104.5,119.2
  pour cut-out: 104.3,119.7 114.5,119.7 114.5,119.4 114.3,119.2 104.5,119.2
  pour cut-out: 104.3,119.7 114.5,119.7 114.5,119.4 114.3,119.2 104.5,119.2
  pour cut-out: 115,118.7 115.9,117.8 115.9,107.7 111.7,103.5 105,103.5 104.3,104.2 104.3,117.8 105.2,118.7 105.4,118.7 105.9,119.2 115.2,119.2 116.4,118 116.4,107.5 111.9,103 104.8,103 103.8,104 103.8,118 105,119.2 105.8,119.2